# Altium PCB OSSI-1 Board Riser.PcbDoc
Units mil, origin at the board's own origin, x right, y up, seen from the top; angles counter-clockwise.
Board outline 493 x 3465 mil, 2 copper layers (Top, Bottom), stack 61.811 mil thick; 3 components, 41 nets, 54 pads, 0 vias.
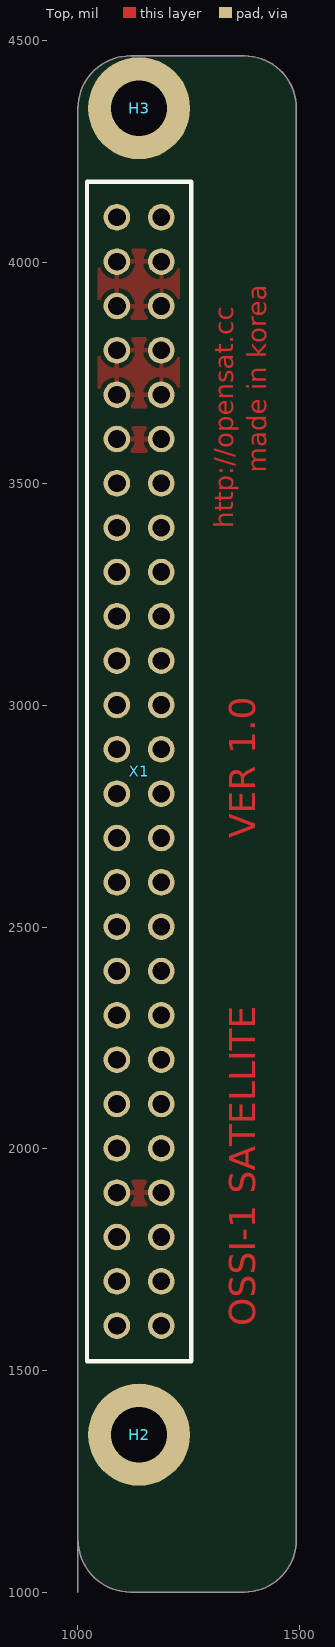
[diagram p0: Top view]
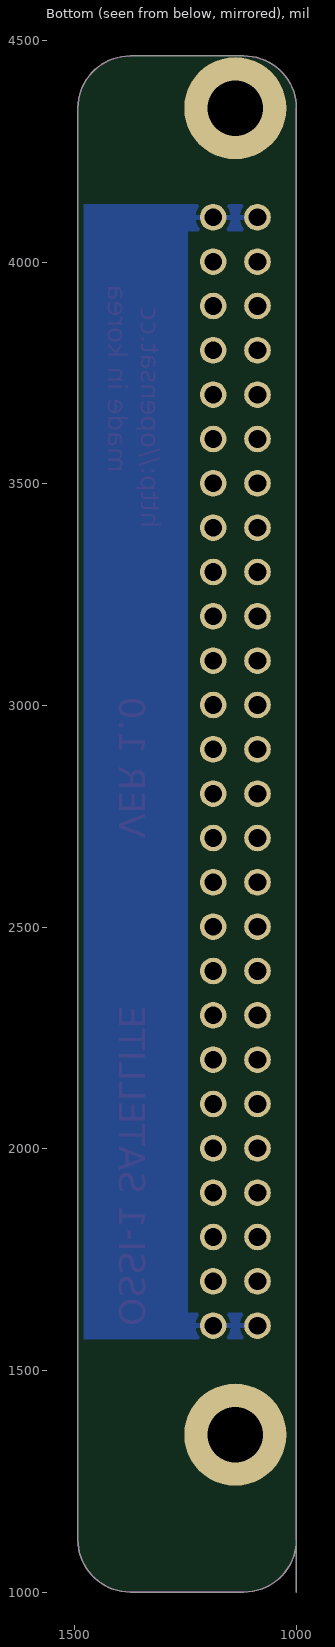
[diagram p1: Bottom view, seen from below]

## Layer stack, top to bottom
Top Solder: solder mask 0.4, Solder Resist, Dk 3.5
Top: signal copper 1.378
Dielectric 1: core 59.0551, FR-4, Dk 4.8
Bottom: signal copper 1.378
Bottom Solder: solder mask 0.4, Solder Resist, Dk 3.5

## Board outline
1000,4347 1000,1119 ccw(c1119,1119) 1119,1000 1375,1000 ccw(c1374.5,1118.5) 1493,1119 1493,4347 ccw(c1375,4347) 1375,4465 1119,4465 ccw(c1118.5,4346.5) 1000,4347 1000,1119 1000,1000

## Design rules (kind name [scope] priority, off if disabled: settings)
Clearance mdViaVia [IsVia vs IsVia] p1: gap=8
Clearance mdPadVia [IsPad vs IsVia] p2: gap=8
Clearance mdPadPad [IsPad vs IsPad] p3: gap=8
Clearance mdWireVia [(InLayerClass('Signal Layers') AND IsTrack) vs IsVia] p4: gap=8
Clearance mdWirePad [(InLayerClass('Signal Layers') AND IsTrack) vs IsPad] p5: gap=8
Clearance mdWireWire [(InLayerClass('Signal Layers') AND IsTrack) vs (InLayerClass('Signal Layers') AND IsTrack)] p6: gap=8
Clearance [All] p7: gap=8
HoleSize [All] p1: absolutevalues=TRUE maxlimit=100000 minlimit=24 maxpercent=80.000 minpercent=20.000
HoleToHoleClearance [All] p1: gap=8 allowstackedmicrovias=TRUE
PolygonConnect ThermalVias [IsVia] p1: connectstyle=Direct reliefconductorwidth=10 reliefentries=4 polygonreliefangle="90 Angle" airgapwidth=10
PolygonConnect [All] p2: connectstyle=Relief reliefconductorwidth=10 reliefentries=4 polygonreliefangle="90 Angle" airgapwidth=10
RoutingVias [All] p1: holewidth=28 width=50 viastyle="Through Hole" minholewidth=28 minwidth=50 maxholewidth=28 maxwidth=50
SilkToSilkClearance [All] p1 off: silktosilkclearance=10
SilkToSolderMaskClearance [IsPad] p1 off: minsilkscreentomaskgap=10 clearancetoexposedcopper=TRUE
SolderMaskExpansion [All] p1: expansion=4
Width [All] p1: maxlimit=100000 minlimit=10 preferedwidth=10
26 further rules are at their usual default settings.

## Components (designator, comment, footprint, x,y, rotation, side; value= is the part's Value field where it differs from the comment)
H2 "" 3.2-PAD-ROUND 1138,1355 r0 top
H3 "" 3.2-PAD-ROUND 1138,4347 r0 top
X1 "" ESQ-126-XX-X-D 1138,2851 r0 top

## Footprints (in the part's own frame and the unit in brackets; to place one, negate y for a bottom-side part, rotate by r counter-clockwise, add the part's x,y. Pads: shape width x height; smd on the part's side, far side on the other; paste and mask are expansions set on the pad)
3.2-PAD-ROUND [mil] "3.2-PAD-ROUND"
  round 230 hole 126: B3,2(0,0)
ESQ-126-XX-X-D [mil] "ESQ-126-XX-X-D"
  round 60 hole 40: 1(-50,1250) 2(50,1250) 3(-50,1150) 4(50,1150) 5(-50,1050) 6(50,1050) 7(-50,950) 8(50,950) 9(-50,850) 10(50,850) 11(-50,750) 12(50,750) 13(-50,650) 14(50,650) 15(-50,550) 16(50,550) 17(-50,450) 18(50,450) 19(-50,350) 20(50,350) 21(-50,250) 22(50,250) 23(-50,150) 24(50,150) 25(-50,50) 26(50,50) 27(-50,-50) 28(50,-50) 29(-50,-150) 30(50,-150) 31(-50,-250) 32(50,-250) 33(-50,-350) 34(50,-350) 35(-50,-450) 36(50,-450) 37(-50,-550) 38(50,-550) 39(-50,-650) 40(50,-650) 41(-50,-750) 42(50,-750) 43(-50,-850) 44(50,-850) 45(-50,-950) 46(50,-950) 47(-50,-1050) 48(50,-1050) 49(-50,-1150) 50(50,-1150) 51(-50,-1250) 52(50,-1250)
  silkscreen extent -117,-1330 118,1330

## Part data
H2 H3: library part 3.2-PAD-ROUND
X1: library part ESQ-126-XX-X-D

## Nets (pads, with @x,y where several pads share a name; then routed paths per layer and width w, separated by ;. In a path a pad name is that pad's centre, name@x,y a point inside that pad or via, vN(x,y) a via of type N, cw(c..) or ccw(c..) an arc to the next point about the centre after c; other vN are vias at no path point)
3.3VOBC: X1.45 X1.46
ANT_DEPLOY1: X1.19
ANT_DEPLOY2: X1.20
BAT_-CHRG: X1.42
BAT_-FAULT: X1.44
BAT_-ON: X1.38
BAT_TEMP: X1.47
BEACON_-FAULT: X1.30
BEACON_OFF: X1.24
BEACON_SCL: X1.37
BEACON_SDA: X1.39
BUS_CS: X1.27
COMMS_-FAULT: X1.32
COMMS_OFF: X1.25
COMMS_SCL: X1.41
COMMS_SDA: X1.43
GND: X1.1 X1.2 X1.51 X1.52
LED_-FAULT: X1.28
LED_OFF: X1.23
LED_SCL: X1.33
LED_SDA: X1.35
OBC_-FAULT: X1.34
OBC_OFF: X1.26
PANELTEMP_SCL: X1.29
PANELTEMP_SDA: X1.31
SC_-ON: X1.40
SC_-PFO: X1.48
SCCHG_EN: X1.21
SCOUT_-PG: X1.50
SCOUT_EN: X1.22
SOLAR_-ON: X1.36
SOLAR_CS1: X1.15
SOLAR_CS2: X1.14
SOLAR_CS3: X1.17
SOLAR_CS4: X1.16
SOLAR_CS5: X1.18
SUPERCAP_TEMP: X1.49
VBAT: X1.11 X1.12
VBUS: X1.7 X1.8 X1.9 X1.10
VSOLAR: X1.3 X1.4 X1.5 X1.6
VSUPERCAP: X1.13
pads on no net: H2.B3,2 H3.B3,2

## Polygon pours and split planes (outlines as drawn)
VSOLAR on Top "Top-VSOLAR" (solid, remove dead copper, pour order 2): 1045,4030 1230,4030 1230,3870 1045,3870
3.3VOBC on Top "Top-3.3VOBC" (solid, remove dead copper, pour order 6): 1045,1930 1230,1930 1230,1870 1045,1870
VBUS on Top "Top-VBUS" (solid, remove dead copper, pour order 8): 1045,3830 1230,3830 1230,3670 1045,3670
VBAT on Top "Top-VBAT" (solid, remove dead copper, pour order 10): 1045,3630 1230,3630 1230,3570 1045,3570
GND on Bottom "Bottom-GND" (solid, remove dead copper, pour order 4): 1045,4130 1480,4130 1480,1570 1045,1570 1045,1630 1245,1630 1245,4070 1045,4070

## Keep-outs
Keep-Out Layer:
  lines w0: 1000,1119 ccw(c1119,1119) 1119,1000 1375,1000 ccw(c1374.5,1118.5) 1493,1119 1493,4347 ccw(c1375,4347) 1375,4465 1119,4465 ccw(c1118.5,4346.5) 1000,4347 ; 1000,1119 1000,4347 ; 1000,1119 1000,4347 ; 1000,1119 1000,4347

## Other copper
Top:
  text "made in korea" at 1425,3525 h42.5 r90
  text "http://opensat.cc" at 1350,3400 h42.5 r90
  text "VER 1.0" at 1400,2700 h59.5 r90
  text "OSSI-1 SATELLITE" at 1400,1600 h59.5 r90

## Silkscreen, mask and mechanical layers (free items; w line width, h text height)
Top Solder:
  text "made in korea" at 1425,3525 h42.5 r90
  text "http://opensat.cc" at 1350,3400 h42.5 r90
  text "VER 1.0" at 1400,2700 h59.5 r90
  text "OSSI-1 SATELLITE" at 1400,1600 h59.5 r90
Dimension:
  lines w0: 1000,1119 ccw(c1119,1119) 1119,1000 1375,1000 ccw(c1374.5,1118.5) 1493,1119 1493,4347 ccw(c1375,4347) 1375,4465 1119,4465 ccw(c1118.5,4346.5) 1000,4347 ; 1000,1119 1000,4347 ; 1000,1119 1000,4347 ; 1000,1119 1000,4347

## Text inside footprints (layer, text, board x,y; h text height)
X1: tNames ">NAME" at 963,4301 h108.5; tValues ">VALUE" at 963,4226 h108.5